# Altium PCB MAX2771-eval.PcbDoc
Units mm, origin at the board's own origin, x right, y up, seen from the top; angles counter-clockwise.
Board outline 68.63 x 56.03 mm, 2 copper layers (Top Layer, Bottom Layer); 111 components, 66 nets, 315 pads, 305 vias.
Unrouted connection lines stored in the file: 4.
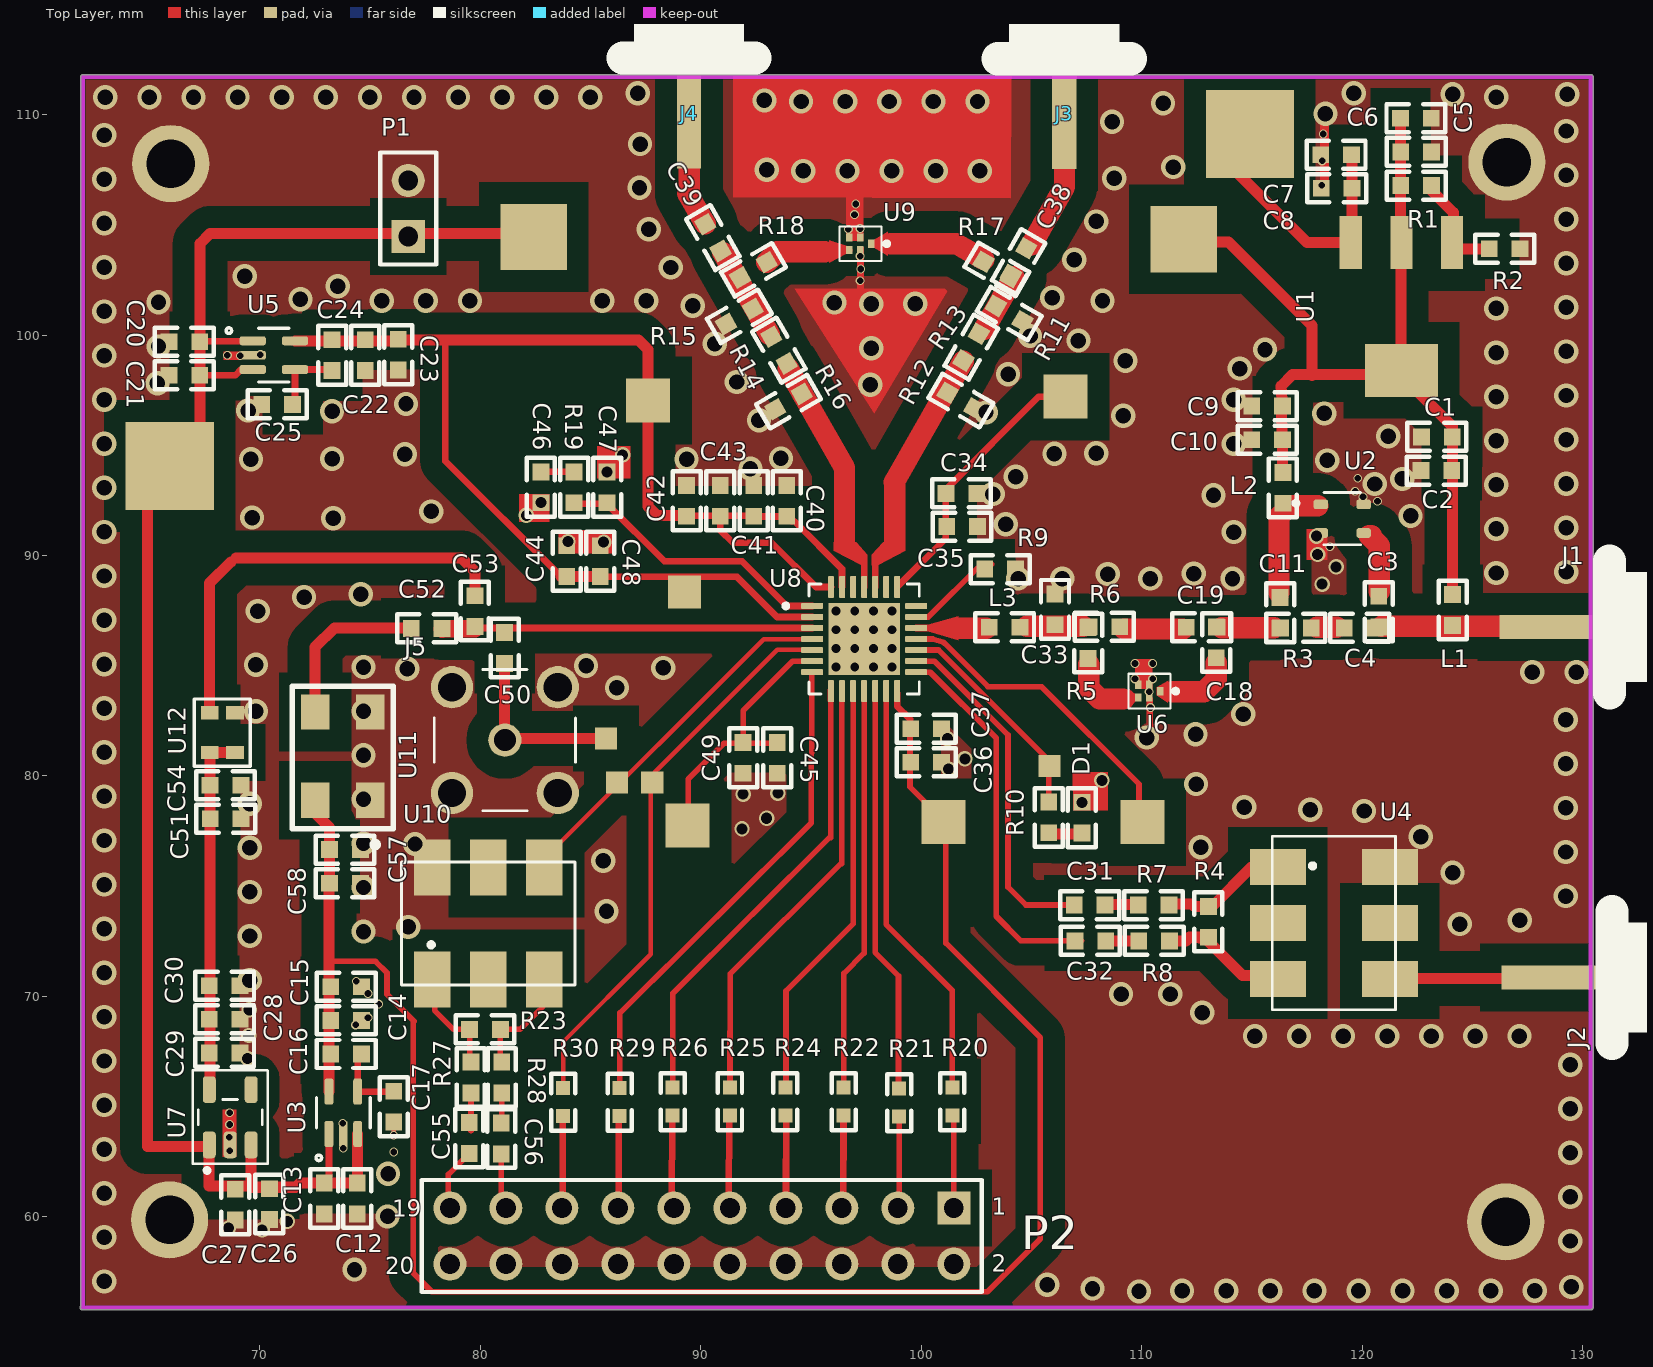
[diagram p0: Top Layer view]
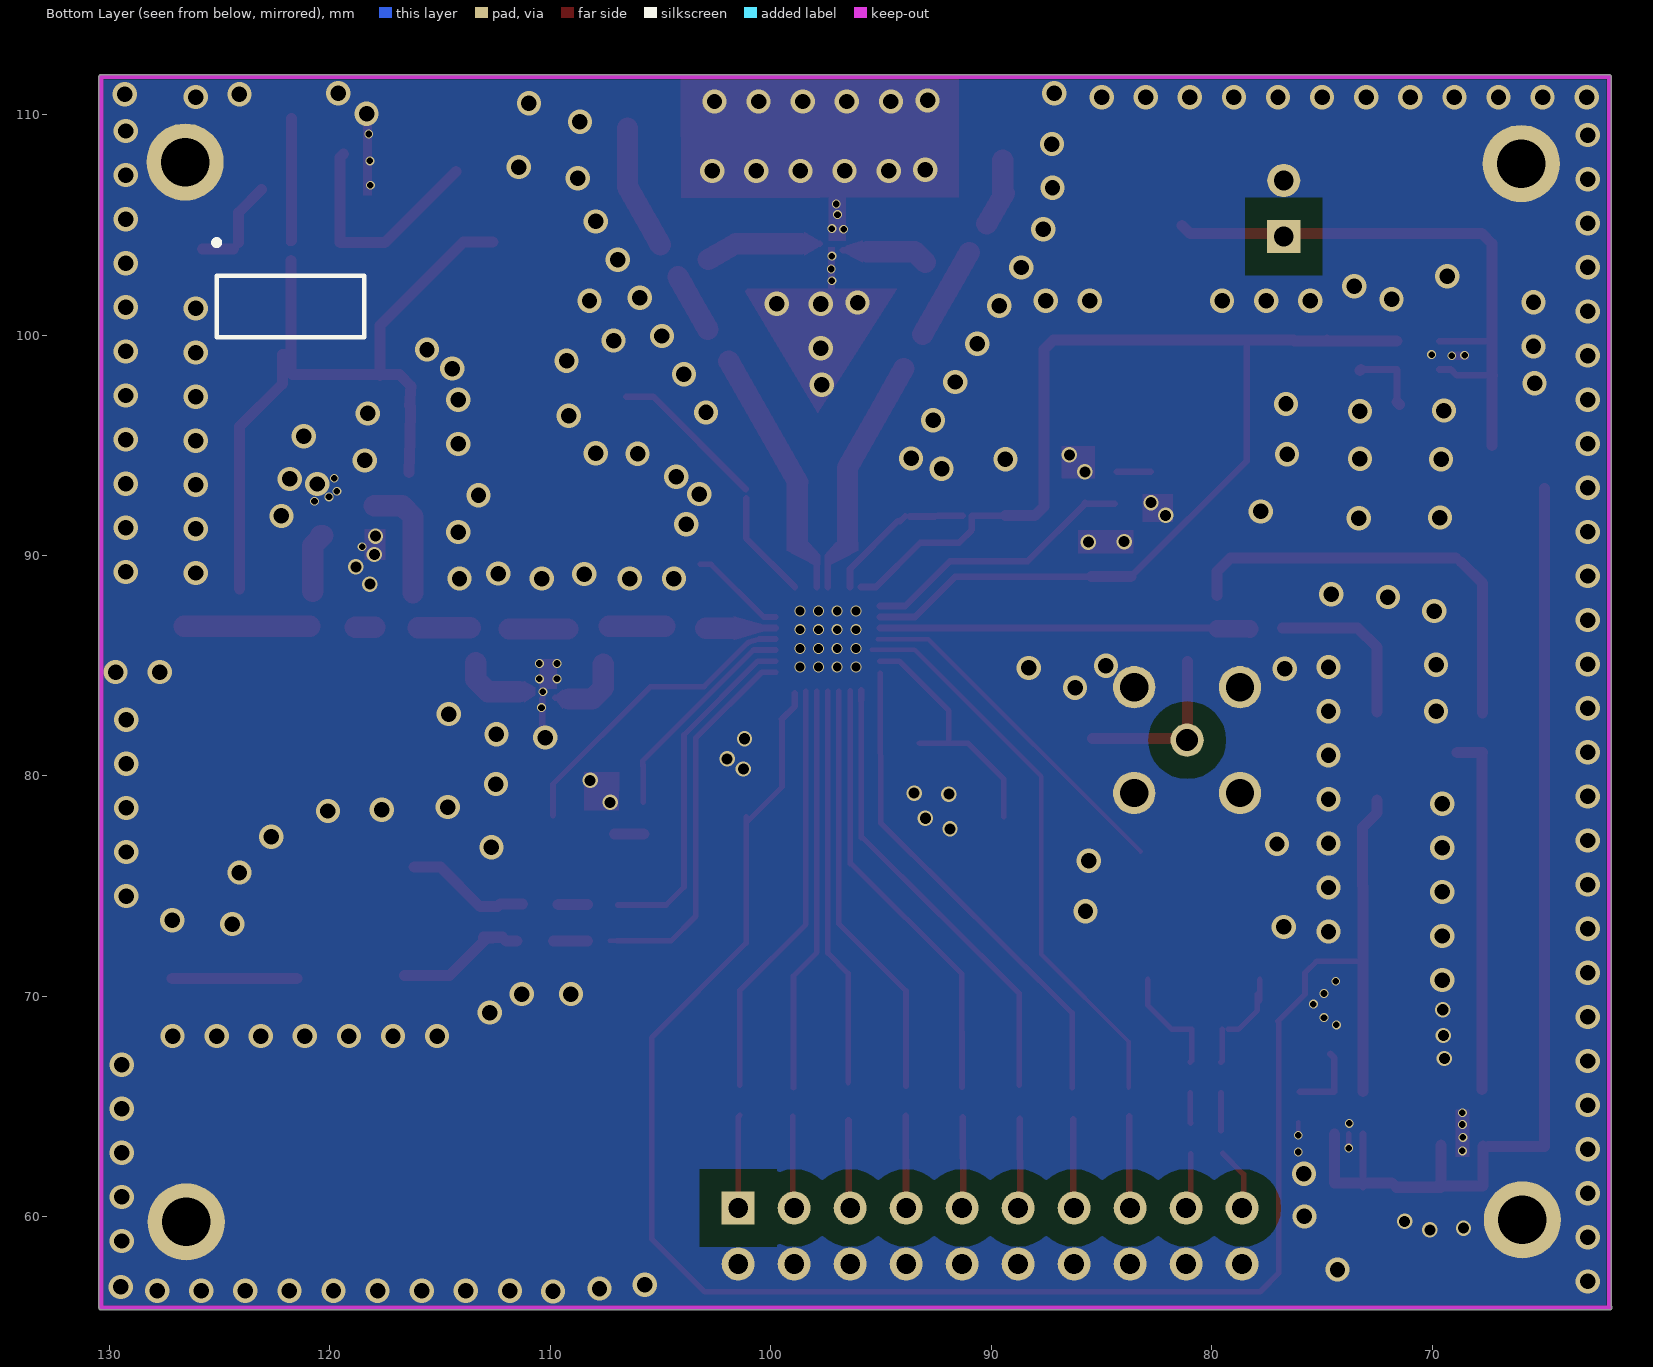
[diagram p1: Bottom Layer view, seen from below]

## Layer stack, top to bottom
Top Solder: solder mask 0.0102, Solder Resist, Dk 3.5
Top Layer: signal copper 0.0356
Dielectric 1: dielectric 0.32, FR-4, Dk 4.8
Bottom Layer: signal copper 0.0356
Bottom Solder: solder mask 0.0102, Solder Resist, Dk 3.5

## Board outline
61.951,55.78 cw(c61.951,55.88) 61.876,55.947 61.876,111.709 cw(c61.976,111.709) 61.976,111.81 130.378,111.81 cw(c130.378,111.709) 130.479,111.709 130.479,55.956 cw(c130.378,55.956) 130.471,55.918 cw(c130.378,55.88) 130.479,55.88 cw(c130.378,55.88) 130.378,55.78

## Design rules (kind name [scope] priority, off if disabled: settings)
Clearance Clearance_1 [OnLayer('Keep-Out Layer')] p1: gap=0.01 ignorepadtopadclearanceinfootprint=FALSE
Clearance [All] p2: gap=0.15 ignorepadtopadclearanceinfootprint=FALSE except(1: Arc-Poly Track-Poly SMDPad-Poly THPad-Poly Via-Poly Fill-Poly Poly-Poly)
PlaneConnect [All] p1: planeconnectstyle=Direct reliefexpansion=0.508 reliefentries=4 reliefconductorwidth=0.254 reliefairgap=0.254
PolygonConnect [All] p1: connectstyle=Direct reliefconductorwidth=0.254 reliefentries=4 polygonreliefangle="90 Angle" airgapwidth=0.254
RoutingVias [All] p1: holewidth=0.711 width=1.27 viastyle="Through Hole" minholewidth=0.3 minwidth=0.4 maxholewidth=2 maxwidth=3
SolderMaskExpansion [All] p1: expansion=0.102
Width [All] p1: maxlimit=1.5 minlimit=0.2 preferedwidth=0.254 minimp=50.000000 maximp=50.000000 favimp=50.000000
29 further rules are at their usual default settings.

## Components (designator, comment, footprint, x,y, rotation, side; value= is the part's Value field where it differs from the comment)
C1 "Cap" 0603 123.393,95.377 r180 top value=0.1uF
C2 "Cap" 0603 123.368,93.853 r180 top value=0.1uF
C3 "Cap" 0603 120.752,87.452 r90 top value=0.1uF
C4 "Cap" 0603 119.888,86.716 r180 top value=6800pF
C5 "Cap" 0603 122.453,108.306 r180 top value=10uF
C6 "Cap" 0603 122.441,109.83 r180 top value=1uF
C7 "Cap" 0603 118.821,108.179 r0 top value=10uF
C8 "Cap" 0603 118.847,106.655 r0 top value=1uF
C9 "Cap" 0603 115.697,96.774 r180 top value=0.1uF
C10 "Cap" 0603 115.697,95.25 r180 top value=0.1uF
C11 "Cap" 0603 116.281,87.401 r270 top value=0.1uF
C12 "Cap" 0603 74.422,60.833 r90 top value=10uF
C13 "Cap" 0603 72.923,60.833 r90 top value=1uF
C14 "Cap" 0603 73.914,68.91 r180 top value=100pF
C15 "Cap" 0603 73.914,70.434 r180 top value=10uF
C16 "Cap" 0603 73.914,67.386 r180 top value=100nF
C17 "Cap" 0603 76.073,64.999 r90 top value=1uF
C18 "Cap" 0603 113.386,86.055 r270 top value=6800pF
C19 "Cap" 0603 112.725,86.741 r180 top value=6800pF
C20 "Cap" 0603 66.573,99.695 r0 top value=10uF
C21 "Cap" 0603 66.573,98.171 r0 top value=1uF
C22 "Cap" 0603 74.778,99.085 r90 top value=100pF
C23 "Cap" 0603 76.276,99.111 r90 top value=10uF
C24 "Cap" 0603 73.279,99.085 r90 top value=100nF
C25 "Cap" 0603 70.79,96.85 r0 top value=1uF
C26 "Cap" 0603 70.434,60.579 r90 top value=10uF
C27 "Cap" 0603 68.885,60.554 r90 top value=1uF
C28 "Cap" 0603 68.402,68.961 r180 top value=1uF
C29 "Cap" 0603 68.402,67.437 r180 top value=100pF
C30 "Cap" 0603 68.402,70.485 r180 top value=10uF
C31 "Cap" 0603 107.645,74.143 r0 top value=open
C32 "Cap" 0603 107.671,72.517 r0 top value=open
C33 "Cap" 0603 106.07,87.554 r90 top value=1.7pF
C34 "Cap" 0603 101.829,92.812 r180 top value=100nF
C35 "Cap" 0603 101.854,91.313 r180 top value=100pF
C36 "Cap" 0603 100.228,80.62 r180 top value=100nF
C37 "Cap" 0603 100.228,82.144 r180 top value=100pF
C38 "Cap" 0603 104.419,103.327 r60 top value=100pF
C39 "Cap" 0603 90.551,104.419 r120 top value=100pF
C40 "Cap" 0603 93.904,92.481 r270 top value=100pF
C41 "Cap" 0603 92.405,92.481 r270 top value=100nF
C42 "Cap" 0603 89.357,92.481 r270 top value=100pF
C43 "Cap" 0603 90.881,92.481 r270 top value=100nF
C44 "Cap" 0603 83.922,89.738 r270 top value=100nF
C45 "Cap" 0603 93.472,80.823 r90 top value=100nF
C46 "Cap" 0603 82.753,93.091 r90 top value=750pF
C47 "Cap" 0603 85.75,93.091 r270 top value=15pF
C48 "Cap" 0603 85.446,89.738 r270 top value=100pF
C49 "Cap" 0603 91.923,80.823 r90 top value=100pF
C50 "Cap" 0603 81.102,85.801 r270 top value=10nF
C51 "Cap" 0603 68.453,78.054 r180 top value=10uF
C52 "Cap" 0603 77.572,86.69 r0 top value=10nF
C53 "Cap" 0603 79.756,87.478 r270 top value=10nF
C54 "Cap" 0603 68.442,79.578 r180 top value=100pF
C55 "Cap" 0603 79.502,63.576 r90 top value=open
C56 "Cap" 0603 80.95,63.551 r90 top value=open
C57 "Cap" 0603 73.863,76.657 r180 top value=100pF
C58 "Cap" 0603 73.863,75.133 r180 top value=10uF
D1 "Diode" 0603 107.29,78.105 r90 top
J1 "SMA" SMA 131.42,86.817 r90 top
J2 "SMA" SMA 131.521,70.917 r90 top
J3 "SMA" SMA 106.426,112.725 r180 top
J4 "SMA" SMA 89.408,112.751 r180 top
J5 "SMA-onboard" SMA-ONBOARD 81.179,81.636 r0 top
L1 "Inductor" 0603 124.104,87.528 r270 top value=5.6nH
L2 "Inductor" 0603 116.408,93.066 r270 top value=5.6nH
L3 "Inductor" 0603 103.784,86.741 r180 top value=5.6nH
P1 "Header 2" HDR1X2 76.733,104.47 r90 top
P2 "Header 10X2" HDR2X10 101.48,60.4 r180 top
R1 "Res1" 0603 122.453,106.782 r180 top value=1k
R2 "Res1" 0603 126.467,103.911 r180 top value=1k
R3 "Res1" 0603 116.992,86.716 r180 top value=0
R4 "Res1" 0603 113.03,73.381 r270 top value=47.5
R5 "Res1" 0603 107.569,86.03 r90 top value=open
R6 "Res1" 0603 108.306,86.766 r180 top value=0
R7 "Res1" 0603 110.541,74.143 r180 top value=47.5
R8 "Res1" 0603 110.566,72.517 r180 top value=47.5
R9 "Res1" 0603 103.581,89.383 r0 top value=50
R10 "Res1" 0603 105.791,78.118 r90 top value=47.5
R11 "Res1" 0603 103.996,100.973 r330 top value=open
R12 "Res1" 0603 101.803,97.028 r330 top value=open
R13 "Res1" 0603 102.268,99.449 r60 top value=0
R14 "Res1" 0603 93.548,99.314 r300 top value=0
R15 "Res1" 0603 91.753,100.846 r210 top value=open
R16 "Res1" 0603 93.98,96.977 r210 top value=open
R17 "Res1" 0603 103.437,102.98 r150 top value=open
R18 "Res1" 0603 92.388,102.954 r30 top value=open
R19 "Res1" 0603 84.252,93.091 r270 top value=15K
R20 "Res1" 0402 101.397,65.253 r90 top value=0
R21 "Res1" 0402 98.984,65.202 r90 top value=0
R22 "Res1" 0402 96.469,65.253 r90 top value=0
R23 "Res1" 0603 80.213,68.504 r0 top value=47.5
R24 "Res1" 0402 93.828,65.253 r90 top value=0
R25 "Res1" 0402 91.313,65.253 r90 top value=0
R26 "Res1" 0402 88.709,65.253 r90 top value=0
R27 "Res1" 0603 79.578,66.319 r270 top value=47.5
R28 "Res1" 0603 80.975,66.319 r270 top value=47.5
R29 "Res1" 0402 86.309,65.227 r90 top value=0
R30 "Res1" 0402 83.744,65.227 r90 top value=0
U1 "LM317" SOT223 121.717,101.321 r90 top
U2 "SPF5043Z" SPF5043Z 119.101,91.669 r0 top
U3 "700-MAX8510EXK29T" SC70 73.787,64.719 r90 top
U4 "ADTT4-1+" ADTT4-1+ 118.872,73.228 r270 top
U5 "700-MAX8510EXK29T" SC70 70.637,99.085 r0 top
U6 "B39162B4327P810" B39162B4327P810 110.346,83.845 r180 top
U7 "TPS7A20" SOT23-5 68.783,64.516 r90 top
U8 "MAX2771" MAX2771 97.41,86.21 r0 top
U9 "B39162B4327P810" B39162B4327P810 97.239,104.14 r180 top
U10 "ADTT4-1+" ADTT4-1+ 80.467,73.457 r0 top
U11 "XNCLH20M000THJA1P0" XNCLH20M000THJA1P0 73.762,80.899 r90 top
U12 "LFTCXO077226" IQXT-225 68.301,81.966 r90 top

## Footprints (in the part's own frame and the unit in brackets; to place one, negate y for a bottom-side part, rotate by r counter-clockwise, add the part's x,y. Pads: shape width x height; smd on the part's side, far side on the other; paste and mask are expansions set on the pad)
0402 [mil]
  rect 25x25 smd: 1(-25.5,-0.5) 2(24.5,-0.5)
  silkscreen extent -52,-22 50,21
0603 [mil]
  rect 30x30 smd: 1(-27.5,0) 2(27.5,0)
  silkscreen extent -52,-25 52,25
ADTT4-1+ [mil]
  rect 65x100 smd: 1(-104,-106) 2(-4,-106) 3(96,-106) 4(96,94) 5(-4,94) 6(-104,94)
  silkscreen extent -159,-116 151,104
B39162B4327P810 [mm]
  rect 0.3x0.375 smd: 1(-0.5,0) 2(0,-0.288) 3(0.5,-0.288) 4(0.5,0.288) 5(0,0.288)
  silkscreen extent -1.3,-0.79 0.94,0.79
HDR1X2 [mm] "Connector; Header; 2 Position"
  rect 1.5x1.5 hole 0.9: 1(0,0)
  round 1.5 hole 0.9: 2(2.54,0)
  silkscreen extent -1.27,-1.27 3.81,1.27
HDR2X10 [mm] "Connector; Header; 10x2 Position"
  rect 1.5x1.5 hole 0.9: 1(0,0)
  round 1.5 hole 0.9: 2(0,2.54) 3(2.54,0) 4(2.54,2.54) 5(5.08,0) 6(5.08,2.54) 7(7.62,0) 8(7.62,2.54) 9(10.16,0) 10(10.16,2.54) 11(12.7,0) 12(12.7,2.54) 13(15.24,0) 14(15.24,2.54) 15(17.78,0) 16(17.78,2.54) 17(20.32,0) 18(20.32,2.54) 19(22.86,0) 20(22.86,2.54)
  silkscreen extent -1.27,-1.27 24.13,3.81
IQXT-225 [mm]
  rect 0.6x0.8 smd: 1(-0.9,-0.575) 2(0.9,-0.575) 3(0.9,0.575) 4(-0.9,0.575)
  silkscreen extent -1.52,-1.27 1.52,1.27
MAX2771 [mm]
  rect 3.25x3.25 smd paste-3: 0(0,0)
  rrect25% 0.99x0.27 smd: 1(-2.36,1.5) 2(-2.36,1) 3(-2.36,0.5) 4(-2.36,0) 5(-2.36,-0.5) 6(-2.36,-1) 7(-2.36,-1.5) 15(2.36,-1.5) 16(2.36,-1) 17(2.36,-0.5) 18(2.36,0) 19(2.36,0.5) 20(2.36,1) 21(2.36,1.5)
  rrect25% 0.27x0.99 smd: 8(-1.5,-2.36) 9(-1,-2.36) 10(-0.5,-2.36) 11(0,-2.36) 12(0.5,-2.36) 13(1,-2.36) 14(1.5,-2.36) 22(1.5,2.36) 23(1,2.36) 24(0.5,2.36) 25(0,2.36) 26(-0.5,2.36) 27(-1,2.36) 28(-1.5,2.36)
  silkscreen extent -3.65,-2.5 2.5,2.5
SC70 [mm]
  rrect50% 1.19x0.4 smd: 1(-0.96,0.65) 2(-0.96,0) 3(-0.96,-0.65) 4(0.96,-0.65) 5(0.96,0.65)
  silkscreen extent -2.17,-1.22 0.68,1.24
SMA [mm]
  rect 1.1x5 smd: 1(-0.064,2.692)
  silkscreen extent -3.06,-2.31 2.94,0.19
SMA-ONBOARD [mm]
  round 1.508 hole 1: 1(-0.064,-0.013)
  round 1.92 hole 1.28: 2(-2.464,2.387) 3(-2.464,-2.413) 4(2.337,-2.413) 5(2.337,2.387)
  silkscreen extent -3.26,-3.21 3.14,3.19, body extent -3.31,-3.26 3.19,3.24, height 13.6
SOT23-5 [mm]
  rrect50% 1.21x0.59 smd: 1(-1.255,1.077) 2(-1.255,0.127) 3(-1.255,-0.823) 4(1.255,-0.823) 5(1.255,1.077)
  silkscreen extent -2.51,-1.57 2.13,1.83
SOT223 [mm]
  rect 2.4x1 smd: 1(2.873,-2.369) 2(2.873,-0.069) 3(2.873,2.231)
  rect 2.4x3.3 smd: 4(-2.927,-0.069)
  body extent -1.88,-3.42 1.82,3.28, height 1.7
SPF5043Z [mm]
  rrect50% 0.66x0.44 smd: 1(-0.97,0.65) 2(-0.97,-0.65) 3(0.97,-0.65) 4(0.97,0.65)
  silkscreen extent -2.2,-1.18 0.83,1.18
XNCLH20M000THJA1P0 [mm]
  rect 1.6x1.3 smd: 1(-2,-1.25) 4(2,-1.25) 5(2,1.25) 8(-2,1.25)
  silkscreen extent -4.15,-2.29 3.17,2.29

## Part data
C1 C2 C3 C4 C5 C6 C7 C8 C9 C10 C11 C12 C13 C14 C15 C16 C17 C18 C19 C20 C21 C22 C23 C24 C25 C26 C27 C28 C29 C30 C31 C32 C33 C34 C35 C36 C37 C38 C39 C40 C41 C42 C43 C44 C45 C46 C47 C48 C49 C50 C51 C52 C53 C54 C55 C56 C57 C58: "Capacitor", LatestRevisionDate=17-Jul-2002, LatestRevisionNote="Re-released for DXP Platform.", PackageDescription="Radial Cap, Thru-Hole; 2 Leads; 0.3 in Pin Spacing", PackageReference=RAD-0.3, Published=8-Jun-2000, Publisher="Altium Limited"
D1: "Default Diode", Code_JEDEC=DO-214-AB, LatestRevisionDate=17-Jul-2002, LatestRevisionNote="Re-released for DXP Platform.", PackageDescription="DO-214-AB/SMC; 2 C-Bend Leads; Body 7.9 x 5.9 mm, inc. leads (LxW)", PackageReference=SMC, PackageVersion=Sep-1996, Published=8-Jun-2000, Publisher="Altium Limited"
P1: "Header, 2-Pin", LatestRevisionDate=17-Jul-2002, LatestRevisionNote="Re-released for DXP Platform.", Publisher="Altium Limited"
P2: "Header, 10-Pin, Dual row", LatestRevisionDate=17-Jul-2002, LatestRevisionNote="Re-released for DXP Platform.", Publisher="Altium Limited"
R1 R2 R3 R4 R5 R6 R7 R8 R9 R10 R11 R12 R13 R14 R15 R16 R17 R18 R19 R20 R21 R22 R23 R24 R25 R26 R27 R28 R29 R30: "Resistor", LatestRevisionDate=17-Jul-2002, LatestRevisionNote="Re-released for DXP Platform.", PackageDescription="Axial Device, Thru-Hole; 2 Leads; 0.3 in Pin Spacing", PackageReference=AXIAL-0.3, Published=8-Jun-2000, Publisher="Altium Limited"
U8: "Multiband Universal GNSS Receiver"
L1 L2 L3: Code_IEC=1005, Code_JEITA=0402, LatestRevisionDate=29-May-2009, LatestRevisionNote="IPC-7351 Footprint Added.", PackageDescription="Chip Inductor", PackageReference=0402-A, Published=8-Jun-2000, Publisher="Altium Limited"

## Free pads (board coordinates)
  rect 4x4 smd: 3(65.913,94.056) 3(114.91,109.118)
  rect 3x3 smd: 3(82.423,104.445) 3(111.912,104.343)
  rect 1x1 smd: 4(85.7,81.7) 4(86.2,79.7) 4(87.8,79.7) 4(105.816,80.442)
  rect 2x2 smd: 4(87.605,97.028) 4(89.408,77.749) 4(101.016,77.902) 4(106.553,97.206) 4(110.033,77.902)
  rect 1.5x1.5 smd: 4(89.256,88.341)
  round 3.5 hole 2.2: 5(65.905,59.86) 5(65.956,107.78) 5(126.517,59.766) 5(126.568,107.848)

## Via types
v1: diameter 1.1, hole 0.7, Top Layer to Bottom Layer, 226 vias
v2: diameter 0.4, hole 0.3, Top Layer to Bottom Layer, 37 vias
v3: diameter 0.7, hole 0.5, Top Layer to Bottom Layer, 25 vias
v4: diameter 0.5, hole 0.4, Top Layer to Bottom Layer, 17 vias

## Nets (pads, with @x,y where several pads share a name; then routed paths per layer and width w, separated by ;. In a path a pad name is that pad's centre, name@x,y a point inside that pad or via, vN(x,y) a via of type N, cw(c..) or ccw(c..) an arc to the next point about the centre after c; other vN are vias at no path point)
1.2V: C28.2 C29.2 C30.2 C51.2 C54.2 U7.5 U12.1 U12.4 | length 16.3
  Top Layer w0.5: U12.4 U12.1 ; U7.5@67.743,65.771 67.743,68.961 C54.2 U12.4@67.743,80.874
2.9V: C22.2 C23.2 C24.2 C34.2 C35.2 C40.2 C41.2 C42.2 C43.2 C44.2 C45.2 C48.2 C49.2 pad.4@87.605,97.028 pad.4@89.256,88.341 pad.4@89.408,77.749 pad.4@106.553,97.206 U5.5 U8.2 U8.6 U8.22 U8.27 U8.28 | length 88.9
  Top Layer w0.254: pad.4@89.433,78.143 89.433,79.858 91.059,81.483 C49.2@91.923,81.483 ; C45.2@93.256,81.483 C49.2@91.923,81.483 ; U8.6 94.176,85.21 91.923,82.956 C49.2 C49.2@91.923,81.483
  Top Layer w0.3: 78.41,99.72 78.41,94.285 C44.2@83.655,89.04 ; C48.2@85.446,89.027 91.643,89.027 93.46,87.21 U8.2 ; C42.2@89.357,91.808 90.881,91.808 C43.2 90.881,91.161 91.465,90.576 93.224,90.576 95.23,88.57 U8.28 ; 91.3,91.796 C41.2@92.431,91.796 ; C41.2@92.57,91.77 C40.2@93.701,91.77 ; C40.2 94.135,91.552 94.248,91.552 96.41,89.39 U8.27 ; U8.22 101.117,90.777 C34.2@101.117,92.583 ; C34.2@101.146,93.015 105.337,97.206 pad.4@106.553,97.206
  Top Layer w0.5: U5.5 73.279,99.735 C22.2@74.729,99.735 ; C22.2 C22.2@74.729,99.735 ; C23.2@76.276,99.735 C22.2@74.729,99.735 ; C23.2@76.276,99.771 78.41,99.771 87.173,99.771 87.605,99.339 pad.4@87.605,97.155 ; C44.2@83.655,89.04 C44.2 C48.2 ; pad.4@87.605,97.087 87.605,97.028 87.605,92.227 88.024,91.808 C42.2@89.357,91.808
2.9V(2): C14.2 C15.2 C16.2 C36.2 C37.2 C57.2 C58.2 pad.4@101.016,77.902 pad.4@110.033,77.902 U3.5 U8.14 U8.18 U11.8 | length 102.1
  Top Layer w0.254: 73.025,71.59 73.139,71.59 75.248,71.59 75.768,71.069 75.768,70.099 76.997,68.869 ; 76.962,68.834 76.962,57.438 77.8,56.6 103,56.6 105.4,59 105.4,68.133 101.117,72.415 pad.4@101.117,78.156 ; 99.492,82.575 99.492,79.502 pad.4@101.054,77.94 ; U8.18 100.522,86.21 101.004,86.067 101.05,86.021 103.023,84.049 105.461,84.049 105.535,83.974 109.88,79.629 pad.4@109.88,78.207
  Top Layer w0.3: U8.14@98.908,83.744 98.908,83.16 99.492,82.575
  Top Layer w0.5: U11.8 72.512,78.314 73.165,77.66 C57.2 C58.2 C58.2@73.165,75.006 ; U3.5 C15.2@73.137,70.356 ; C15.2@73.139,70.434 73.139,71.59 C58.2@73.139,74.981
+5V: C1.1 C2.1 C5.2 C6.2 C9.1 C10.1 C12.2 C13.2 C20.2 C21.2 C26.2 C27.2 L1.1 L2.1 P1.1 pad.3@65.913,94.056 pad.3@82.423,104.445 pad.3@111.912,104.343 R1.2 U1.2 U1.4 U3.1 U3.3 U5.1 U5.3 U7.1 U7.3 | length 118.2
  Top Layer w0.3: C21.2@67.274,98.171 C20.2@67.274,99.545 ; C21.2@67.285,98.171 68.885,98.171 69.149,98.435 U5.3 ; C20.2@67.409,99.71 U5.1@69.677,99.71 ; C13.2@73.137,61.341 73.137,61.531 U3.1 ; U1.2@121.742,104.288 U1.2@121.837,104.193
  Top Layer w0.5: pad.3@64.897,93.04 64.897,63.195 U7.1@67.437,63.195 ; C21.2@67.274,98.171 C21.2@67.285,98.171 ; pad.3@67.285,94.996 C21.2@67.285,98.171 ; 67.691,61.392 U7.1@67.691,63.221 ; 67.716,61.392 69.606,61.392 ; U7.3 69.606,61.392 ; 69.748,61.392 69.606,61.392 ; C12.2 73.137,61.531 C13.2 71.819,61.531 71.628,61.341 69.596,61.341 69.606,61.351 69.606,61.392 ; C12.2@74.437,61.531 U3.3 ; pad.3@81.356,104.968 80.986,104.597 67.742,104.597 67.285,104.14 C21.2@67.285,98.171 ; pad.3@112.598,104.216 113.944,104.216 117.729,100.432 117.729,98.209 ; C9.1@116.338,96.773 116.374,95.249 L2.1 ; C9.1 116.332,97.688 116.853,98.209 117.729,98.209 ; 117.729,98.171 117.729,98.209 ; U1.4@121.691,98.209 117.729,98.209 ; U1.2@121.742,104.288 121.742,108.306 C6.2 ; U1.4@121.768,98.393 U1.4@121.768,99.187 ; U1.2@121.768,103.378 U1.4@121.768,99.187 ; U1.4@121.895,99.187 U1.4@121.768,99.187 ; U1.4@122.072,98.774 U1.4@122.142,98.774 ; U1.4@122.149,99.111 122.149,97.79 124.092,95.847 C1.1 L1.1@124.092,88.468
ADC_CLKIN: pad.4@87.8,79.7 R30.2 U8.5 | length 25.9
  Top Layer w0.2: R30.2 83.757,67.932 87.732,71.907 87.732,79.985 93.466,85.719 U8.5@95.431,85.719
CLKOUT: pad.4@86.2,79.7 U8.4 U10.4 | length 15.9
  Top Layer w0.2: U10.4@83.223,76.568 92.857,86.202 U8.4@95.152,86.202
CLKOUT1: C55.1 P2.19 | length 2.6
  Top Layer w0.254: P2.19@78.552,60.706 78.552,61.928 C55.1
CLKOUT2: C56.1 P2.17 | length 2
  Top Layer w0.254: P2.17@80.95,60.884 C56.1
CSN: R25.2 U8.9 | length 20.1
  Top Layer w0.254: R25.2 91.344,71.033 96.368,76.022 ; 96.402,76.022 U8.9@96.402,83.85
GND: C1.2 C2.2 C5.1 C6.1 C7.1 C8.1 C9.2 C10.2 C12.1 C13.1 C14.1 C15.1 C17.1 C20.1 C21.1 C22.1 C23.1 C25.1 C26.1 C27.1 C28.1 C29.1 C30.1 C33.2 C34.1 C35.1 C36.1 C37.1 C40.1 C41.1 C42.1 C43.1 C44.1 C45.1 C46.1 C47.1 C48.1 C49.1 C51.1 C54.1 C57.1 C58.1 D1.2 J5.2 J5.3 J5.4 J5.5 P1.2 P2.2 P2.4 P2.6 P2.8 P2.10 P2.12 P2.14 P2.16 P2.18 P2.20 pad.5 R2.1 R9.2 R11.2 R12.2 R15.2 R16.2 U2.2 U2.4 U3.2 U4.6 U5.2 U6.2 U6.3 U6.5 U7.2 U8.0 U9.2 U9.3 U9.5 U10.6 U11.1 U11.4 U12.2 | length 1.8
  Top Layer w0.2: v2(76.073,63.703) C17.1
  Top Layer w0.254: v2(73.787,63.119) U3.2 ; U6.5 U6.2
  other v1: 109.88,56.617 111.836,56.642 113.836,56.642 115.836,56.642 117.836,56.642 119.836,56.642 121.836,56.642 123.836,56.642 125.836,56.642 127.836,56.642 107.772,56.744 129.489,56.82 105.715,56.921 62.941,57.069 74.295,57.607 129.443,58.904 62.941,59.069 75.794,60.02 129.443,60.904 62.941,61.069 75.819,61.951 129.443,62.904 62.941,63.069 129.443,64.904 62.941,65.069 129.443,66.904 62.941,67.069 115.138,68.199 117.138,68.199 119.138,68.199 121.138,68.199 123.138,68.199 125.138,68.199 127.138,68.199 62.941,69.069 112.751,69.266 109.068,70.104 111.303,70.104 69.545,70.739 62.941,71.069 69.545,72.739 74.701,72.938 62.941,73.069 76.733,73.152 124.435,73.279 127.152,73.457 85.725,73.863 129.242,74.549 69.545,74.739 74.701,74.938 62.941,75.069 124.104,75.616 85.573,76.149 129.242,76.549 69.545,76.739 112.674,76.759 77.038,76.911 74.701,76.938 62.941,77.069 122.657,77.241 120.091,78.41 117.653,78.461 129.242,78.549 114.656,78.588 69.545,78.739 74.701,78.938 62.941,79.069 112.471,79.629 129.242,80.549 74.701,80.938 62.941,81.069 110.236,81.737 112.446,81.89 129.242,82.549 114.605,82.804 69.825,82.931 74.701,82.938 62.941,83.069 86.2,84 127.722,84.709 129.722,84.709 76.683,84.861 88.3,84.9 74.701,84.938 84.8,85 69.825,85.039 62.941,85.069 62.941,87.069 69.901,87.478 72.009,88.113 74.574,88.24 104.394,88.951 106.394,88.951 110.394,88.951 114.122,88.951 62.941,89.069 108.458,89.154 112.37,89.179 126.086,89.205 129.261,89.256 62.941,91.069 114.173,91.059 126.086,91.205 129.261,91.256 103.835,91.415 73.33,91.694 69.647,91.719 122.199,91.796 77.775,91.999 113.259,92.735 103.251,92.786 62.941,93.069 126.086,93.205 120.574,93.243 129.261,93.256 121.818,93.472 104.292,93.574 92.253,93.929 118.415,94.31 69.596,94.361 89.357,94.361 73.279,94.386 93.639,94.403 76.581,94.59 106.045,94.615 107.944,94.64 114.173,95.059 62.941,95.069 126.086,95.205 129.261,95.256 121.183,95.402 92.639,96.135 109.164,96.342 118.288,96.444 102.941,96.491 73.279,96.545 69.469,96.571 76.632,96.876 114.173,97.059 62.941,97.069 126.086,97.205 129.261,97.256 97.688,97.739 65.354,97.815 91.639,97.867 103.941,98.223 114.452,98.476 109.265,98.831 62.941,99.069 126.086,99.205 129.261,99.256 115.595,99.339 97.739,99.405 65.405,99.482 90.639,99.599 107.132,99.746 104.941,99.955 62.941,101.069 126.086,101.205 129.261,101.256 89.639,101.331 97.739,101.405 97.729,101.422 99.729,101.422 65.405,101.482 96.063,101.473 75.528,101.549 77.528,101.549 79.528,101.549 85.528,101.549 87.528,101.549 108.224,101.549 71.841,101.625 105.941,101.687 73.533,102.21 69.317,102.667 62.941,103.069 88.639,103.063 129.261,103.256 106.941,103.419 87.639,104.796 62.941,105.069 107.941,105.151 129.261,105.256 87.224,106.68 62.941,107.069 108.763,107.112 129.261,107.256 94.656,107.442 96.656,107.442 98.656,107.442 100.656,107.442 102.656,107.442 92.989,107.493 111.43,107.62 87.249,108.661 62.941,109.069 129.261,109.256 108.661,109.677 118.339,110.033 110.973,110.515 94.554,110.592 96.554,110.592 98.554,110.592 100.554,110.592 102.554,110.592 92.888,110.642 62.992,110.79 64.992,110.79 66.992,110.79 68.992,110.79 70.992,110.79 72.992,110.79 72.992,110.79 74.992,110.79 74.992,110.79 76.992,110.79 78.992,110.79 80.992,110.79 82.992,110.79 84.992,110.79 126.086,110.795 124.104,110.922 129.311,110.922 87.147,110.973 119.62,110.973
  other v2: 76.073,62.941 68.631,62.992 68.605,63.602 68.631,64.186 73.762,64.237 68.631,64.719 74.346,68.707 74.905,69.037 75.387,69.647 74.905,70.129 74.371,70.688 110.4,83.1 110.338,83.82 109.7,84.4 110.5,84.4 109.7,85.1 110.5,85.1 118.542,90.399 120.701,92.456 120.04,92.659 119.685,92.913 119.8,93.5 69.113,99.06 68.529,99.085 70.028,99.111 97.231,102.464 97.257,102.997 97.231,103.581 96.698,104.8 97.231,104.826 96.977,105.461 97.028,105.943 118.164,106.798 118.186,107.899 118.237,109.118
  other v3: 70.104,59.411 68.58,59.487 71.247,59.792 69.444,67.183 69.494,68.224 69.52,69.393 91.872,77.597 92.989,78.08 107.29,78.803 91.923,79.172 93.497,79.223 108.2,79.8 101.244,80.315 101.981,80.772 101.194,81.686 118.186,88.697 118.821,89.484 117.983,90.043 85.598,90.602 83.972,90.627 117.932,90.881 82.093,91.821 82.753,92.392 85.75,93.789 86.462,94.564
  other v4: 96.14,84.94 96.14,84.94 96.987,84.94 97.833,84.94 98.68,84.94 96.14,85.787 96.987,85.787 97.833,85.787 98.68,85.787 96.14,86.633 96.987,86.633 97.833,86.633 98.68,86.633 96.14,87.48 96.987,87.48 97.833,87.48 98.68,87.48
l0: R21.2 U8.12 | length 18.4
  Top Layer w0.254: U8.12 97.91,71.99 98.971,70.929 R21.2@98.971,65.849
l1: R20.2 U8.13 | length 19.1
  Top Layer w0.254: U8.13 98.41,73.268 101.409,70.269 R20.2@101.409,65.977
NetC3_1: C3.1 C4.1 J1.1 L1.2 | length 5.7
  Top Layer w0.97: C3.1@120.904,86.792 J1.1@126.619,86.792
NetC3_2: C3.2 U2.3 | length 2.8
  Top Layer w0.97: 120.421,90.907 120.32,90.907 120.777,90.449 C3.2@120.777,88.367
NetC4_2: C4.2 R3.1 | length 0.9
  Top Layer w0.97: R3.1@117.958,86.741 C4.2@118.847,86.741
NetC11_1: C11.1 L2.2 U2.1 | length 5.4
  Top Layer w0.97: C11.1@116.23,88.316 116.23,91.77 116.713,92.253 U2.1@117.983,92.253
NetC11_2: C11.2 C18.1 C19.1 R3.2 | length 2.4
  Top Layer w0.97: C19.1@113.64,86.716 R3.2@116.002,86.716
NetC16_1: C16.1 C17.2 U3.4 | length 3.3
  Top Layer w0.3: C16.1 74.437,67.211 U3.4 C17.2@76.002,65.679
NetC18_2: C18.2 U6.1 | length 3.5
  Top Layer w0.3: U6.1@110.914,83.854 111.438,83.854
  Top Layer w0.97: 111.404,83.82 112.827,83.82 113.386,84.379 C18.2@113.386,85.141
NetC19_2: C19.2 R6.1 | length 2.7
  Top Layer w0.97: R6.1@109.22,86.665 C19.2@111.874,86.665
NetC24_1: C24.1 C25.2 U5.4 | length 3.3
  Top Layer w0.3: C25.2@71.597,96.959 U5.4 C24.1@73.231,98.435
  Top Layer w0.5: C25.2 C25.2@71.597,96.959 ; C24.1@73.231,98.435 C24.1
NetC31_1: C31.1 U8.16 | length 15.8
  Top Layer w0.254: U8.16 100.591,85.21 103.937,81.864 103.937,74.955 104.75,74.143 C31.1
NetC31_2: C31.2 R7.2 | length 1.3
  Top Layer w0.5: C31.2@108.318,74.168 R7.2@109.652,74.168
NetC32_1: C32.1 U8.15 | length 17.3
  Top Layer w0.2: C32.1 C32.1@107.315,72.517
  Top Layer w0.254: U8.15 99.778,84.702 100.413,84.702 103.403,81.712 103.403,73.635 104.521,72.517 C32.1
NetC32_2: C32.2 R8.2 | length 1.5
  Top Layer w0.5: C32.2@108.318,72.517 C32.2 R8.2@109.855,72.517
NetC33_1: C33.1 L3.1 R5.2 R6.2 | length 2.5
  Top Layer w0.3: C33.1@106.007,86.792 C33.1
  Top Layer w0.97: L3.1@104.8,86.792 C33.1@106.007,86.792 ; C33.1@106.147,86.792 R6.2@107.34,86.792
NetC38_1: C38.1 R11.1 R13.2 R17.1 | length 2.7
  Top Layer w0.97: R13.2@102.852,100.252 103.444,101.292 104.166,102.56 R17.1@104.213,102.641
NetC38_2: C38.2 J3.1 | length 5.8
  Top Layer w0.97: C38.2@105.004,104.089 105.493,104.952 ; 105.544,105.045 105.493,104.952 ; J3.1@106.503,109.372 106.499,106.724 105.493,104.952
NetC39_1: C39.1 R14.1 R15.1 R18.1 | length 4.3
  Top Layer w0.97: C39.1@91.002,103.741 91.682,102.547 92.429,101.236 R14.1@93.11,100.039
NetC39_2: C39.2 J4.1 | length 3.3
  Top Layer w0.5: 89.482,106.197 89.482,106.297
  Top Layer w0.97: 89.403,106.435 89.482,106.297 ; J4.1@89.484,107.925 89.482,106.297 ; C39.2@90.197,105.04 89.482,106.297
NetC46_2: C46.2 R19.1 | length 1.5
  Top Layer w0.3: C46.2@82.779,93.789 R19.1 R19.1@84.303,93.789
NetC47_2: C47.2 R19.2 U8.1 | length 12.6
  Top Layer w0.3: R19.2@84.404,92.342 C47.2@85.75,92.342 ; C47.2 C47.2@85.75,92.342 ; U8.1 93.9,87.71 91.872,89.738 88.354,89.738 C47.2@85.75,92.342
NetC50_1: C50.1 C52.2 C53.2 U8.3 | length 16.8
  Top Layer w0.3: C53.2@79.756,86.71 U8.3
  Top Layer w0.8: C52.2@78.27,86.665 C53.2@79.756,86.67
NetC50_2: C50.2 J5.1 pad.4@85.7,81.7 | length 8.2
  Top Layer w0.5: J5.1@81.097,81.702 J5.1@81.102,81.702 ; J5.1@81.102,81.28 J5.1@81.102,81.702 ; C50.2@81.102,85.192 C50.2 J5.1@81.102,81.702 ; pad.4@85.4,81.702 J5.1@81.102,81.702
NetC52_1: C52.1 U11.5 | length 7.6
  Top Layer w0.5: U11.5 72.512,85.847 73.379,86.714 C52.1@76.784,86.714
NetC53_1: C53.1 U12.3 | length 19.4
  Top Layer w0.5: U12.3 67.726,88.757 68.682,89.713 ; 68.91,89.891 79.146,89.891 79.756,89.281 C53.1
NetC55_2: C55.2 R27.2 | length 1.7
  Top Layer w0.254: C55.2@79.578,63.906 R27.2
NetC56_2: C56.2 R28.2 | length 1.4
  Top Layer w0.254: C56.2 80.975,64.275 R28.2
NetD1_1: D1.1 R10.1 | length 1.3
  Top Layer w0.5: R10.1@105.753,77.368 D1.1@107.086,77.368
NetJ2_1: J2.1 U4.4 | length 5.7
  Top Layer w0.5: U4.4@121.488,70.815 J2.1@127.152,70.815
NetL3_2: L3.2 U8.19 | length 4.6
  Top Layer w0.3: U8.19 103.004,86.71 L3.2@103.086,86.792
  Top Layer w0.97: 101.752,86.69 L3.2@102.959,86.69
NetP2_1: P2.1 R20.1 | length 4.2
  Top Layer w0.254: R20.1 101.48,64.534 P2.1
NetP2_3: P2.3 R21.1 | length 4.2
  Top Layer w0.254: P2.3 98.996,60.457 R21.1
NetP2_5: P2.5 R22.1 | length 3.7
  Top Layer w0.3: P2.5@96.461,60.705 R22.1@96.475,64.38
NetP2_7: P2.7 R24.1 | length 3.9
  Top Layer w0.3: P2.7@93.869,60.705 R24.1@93.884,64.579
NetP2_9: P2.9 R25.1 | length 3.8
  Top Layer w0.3: P2.9@91.279,60.706 R25.1@91.293,64.507
NetP2_11: P2.11 R26.1 | length 3.7
  Top Layer w0.3: P2.11@88.687,60.706 R26.1@88.702,64.442
NetP2_13: P2.13 R29.1 | length 3.7
  Top Layer w0.3: P2.13@86.274,60.705 R29.1@86.289,64.427
NetP2_15: P2.15 R30.1 | length 3.8
  Top Layer w0.3: P2.15@83.734,60.705 R30.1@83.749,64.554
NetR1_1: R1.1 R2.2 U1.1 | length 4.6
  Top Layer w0.3: U1.1 U1.1@124.368,103.911
  Top Layer w0.5: R1.1@123.101,106.591 124.137,105.555 U1.1@124.137,104.193 ; U1.1@124.368,103.911 R2.2
NetR4_1: R4.1 R7.1 U4.1 | length 5.9
  Top Layer w0.5: R7.1@111.265,74.193 112.293,74.193 112.408,74.079 R4.1 ; R4.1@112.84,74.066 113.182,74.066 114.986,75.87 U4.1
NetR4_2: R4.2 R8.1 U4.3 | length 6.3
  Top Layer w0.5: R8.1@111.506,72.517 112.014,72.517 112.179,72.682 R4.2 ; 112.624,72.644 112.878,72.644 114.579,70.942 U4.3@116.611,70.942
NetR5_1: R5.1 U6.4 | length 3.3
  Top Layer w0.3: 109.296,83.541 U6.4@109.779,83.541
  Top Layer w0.97: R5.1@107.594,85.065 107.594,83.998 108.102,83.49 109.169,83.49
NetR9_1: R9.1 U8.20 | length 4.4
  Top Layer w0.254: U8.20 100.318,87.21 102.707,89.599 R9.1@103.2,89.599
NetR10_2: pad.4@105.816,80.442 R10.2 U8.17 | length 10.1
  Top Layer w0.254: U8.17 100.788,85.71 100.791,85.709 105.816,80.684 pad.4@105.816,80.442 ; R10.2 pad.4@105.791,80.518
NetR12_1: R12.1 R13.1 U8.24 | length 10.3
  Top Layer w0.3: U8.24@97.916,88.57 97.916,89.864
  Top Layer w0.97: 98.784,93.329 98.806,93.367 ; 98.806,90.627 98.806,93.367 ; R13.1@101.907,98.815 101.116,97.424 98.806,93.367
NetR14_2: R14.2 R16.1 U8.25 | length 9.7
  Top Layer w0.3: U8.25 97.41,89.864
  Top Layer w0.97: R14.2@93.965,98.48 94.613,97.342 94.953,96.746 96.469,94.082 ; 96.52,90.627 96.52,93.98
NetR17_2: R17.2 U9.1 | length 5.2
  Top Layer w0.3: U9.1@97.793,104.14 98.628,104.14
  Top Layer w0.97: 98.628,104.14 101.588,104.14 R17.2@102.84,103.427
NetR18_2: R18.2 U9.4 | length 4
  Top Layer w0.3: 95.599,103.852 U9.4
  Top Layer w0.97: R18.2 93.467,103.778 95.625,103.778
NetR23_1: R23.1 R27.1 U10.1 | length 4.9
  Top Layer w0.254: U10.1@77.826,69.815 U10.1 ; U10.1@77.927,70.104 77.927,69.367 78.791,68.504 R23.1@79.248,68.504 ; R23.1 79.515,67.081 R27.1
NetR23_2: R23.2 R28.1 U10.3 | length 5.1
  Top Layer w0.254: R28.1 80.912,67.081 R23.2 81.794,68.504 82.906,69.615 U10.3
Q0: R22.2 U8.11 | length 18.1
  Top Layer w0.254: R22.2@96.495,66.091 96.495,71.044 97.41,71.96 U8.11
Q1: R24.2 U8.10 | length 19.2
  Top Layer w0.254: R24.2@93.866,65.926 93.866,70.244 96.91,73.288 U8.10
SCLK: R26.2 U8.8 | length 21.7
  Top Layer w0.254: R26.2@88.722,65.964 88.737,70.14 95.848,77.202 ; 95.894,77.197 U8.8@95.894,83.85 ; U8.8@95.91,83.414 U8.8
  Top Layer w0.3: U8.8@95.903,83.432 U8.8@95.903,83.878
SDATA: R29.2 U8.7 | length 22.4
  Top Layer w0.254: R29.2 86.334,69.25 95.018,77.874 95.04,84.092 U8.7@95.04,84.665
Vin: C7.2 C8.2 pad.3@114.91,109.118 U1.3 | length 10.7
  Top Layer w0.5: pad.3@114.275,107.417 117.498,104.193 U1.3 119.537,104.193 119.537,108.06 C7.2@119.393,108.204
pads on no net: U4.2 U4.5 U7.4 U8.21 U8.23 U8.26 U10.2 U10.5

## Polygon pours and split planes (outlines as drawn)
GND on Bottom Layer "Bottom Layer-No Net" (solid, pour order 0): 130.378,111.709 61.976,111.709 61.976,55.905 62.027,55.956 130.378,55.956
GND on Top Layer "Bottom Layer-No Net" (solid, remove dead copper, pour order 2): 130.378,111.709 61.976,111.709 61.976,55.88 130.378,55.88

## Keep-outs
Keep-Out Layer:
  lines w0.2: 61.951,55.88 130.378,55.88 ; 61.976,55.88 61.976,111.709 130.378,111.709 130.378,55.956

## Other copper
Top Layer:
  rectangle net GND: 83.541,90.094 86.055,91.161
  rectangle net GND: 81.763,91.516 83.134,92.786
  rectangle net GND: 85.293,93.497 86.817,94.971
  rectangle net GND: 117.475,89.789 118.44,91.211
  rectangle net GND: 109.703,83.947 110.49,85.293
  rectangle net GND: 68.301,62.713 68.936,64.872
  rectangle net GND: 110.211,82.144 110.515,83.558
  rectangle net GND: 96.596,104.267 97.384,107.036
  rectangle net GND: 97.079,101.473 97.409,103.988
  rectangle net GND: 68.351,98.857 69.113,99.263
  rectangle net GND: 118.085,106.324 118.491,109.906
  region net GND: 106.909,78.435 108.458,78.435 108.458,80.162 106.883,80.188
  region net GND: 104.092,111.735 91.465,111.735 91.465,106.248 104.064,106.197
  region net GND: 101.194,101.981 101.067,102.108 94.259,102.108 97.866,96.444
  region net NetR5_1: 109.703,83.7 109.449,83.936 109.449,83.033 109.703,83.388
  region net NetC18_2: 110.693,84.023 111.201,84.328 111.176,83.312 110.693,83.668
  region net NetR18_2: 95.834,104.292 96.596,104.038 96.596,103.683 95.834,103.276
  region net NetR17_2: 97.866,104.318 98.476,104.673 98.476,103.607 97.866,103.962
  region net NetL3_2: 101.676,87.249 100.305,86.868 100.305,86.563 101.676,86.157
  region net NetR14_2: 97.053,90.602 97.561,90.043 97.561,89.56 97.257,89.586 96.037,90.221 96.037,90.602
  region net NetR12_1: 98.273,90.602 97.765,90.043 97.765,89.56 98.069,89.586 99.289,90.221 99.289,90.602

## Text inside footprints (layer, text, board x,y; h text height)
P2: Top Overlay "20" at 75.7,57.4 h0.76; Top Overlay "19" at 76,60 h0.76; Top Overlay "1" at 103.2,60.1 h0.76; Top Overlay "2" at 103.2,57.5 h0.76